# Altium PCB BopItProject.PcbDoc
Units mil, origin at the board's own origin, x right, y up, seen from the top; angles counter-clockwise.
Board outline 5295 x 2490 mil, 2 copper layers (Top Layer, Bottom Layer); 42 components, 69 nets, 177 pads, 0 vias.
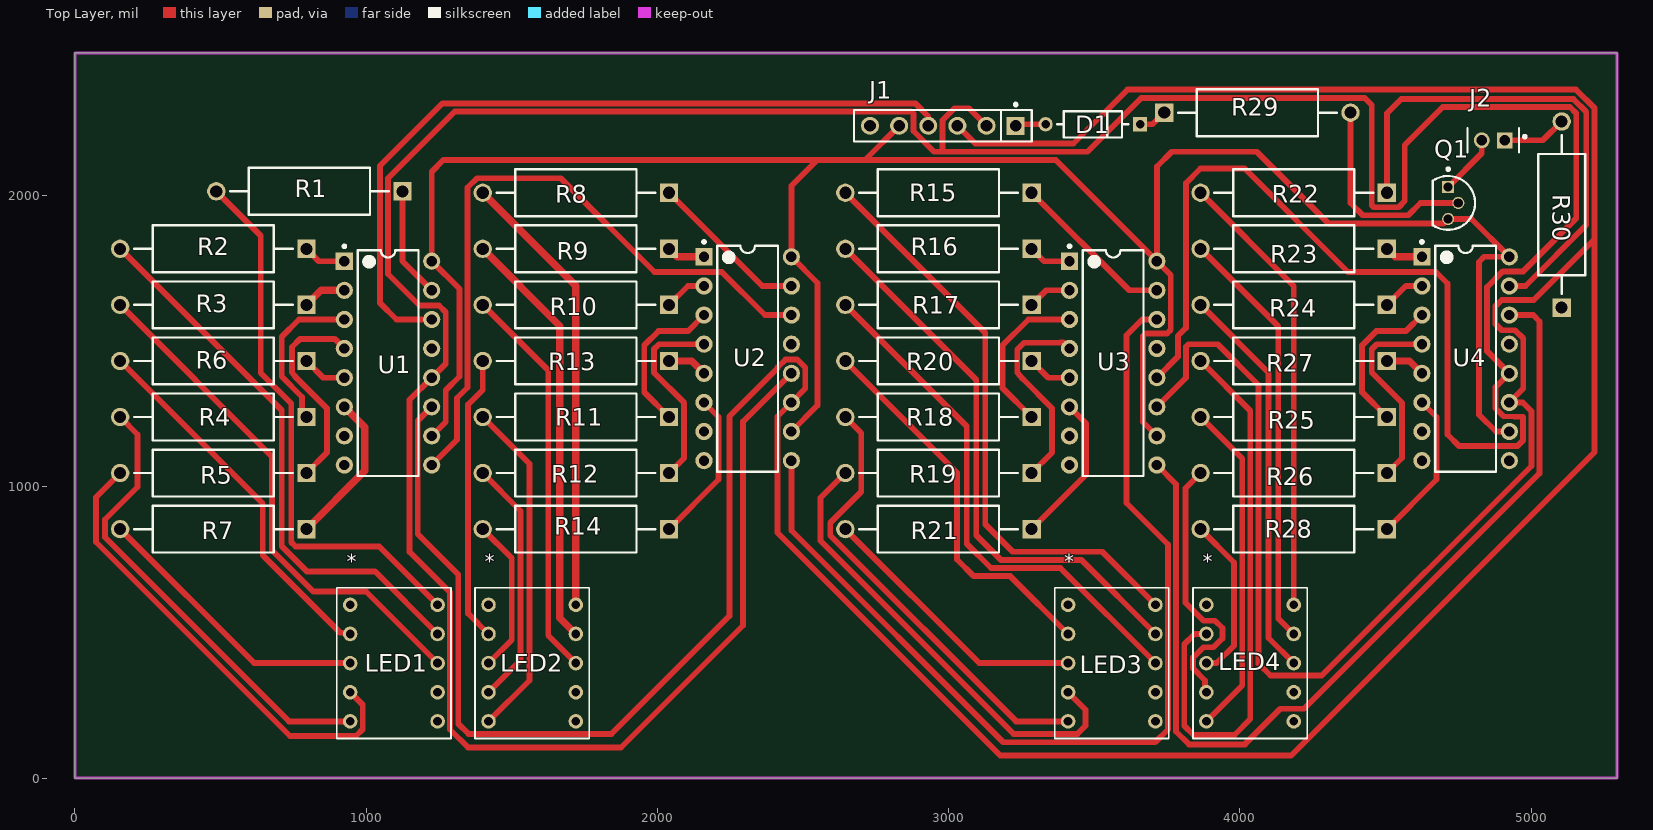
[diagram p0: Top Layer view]
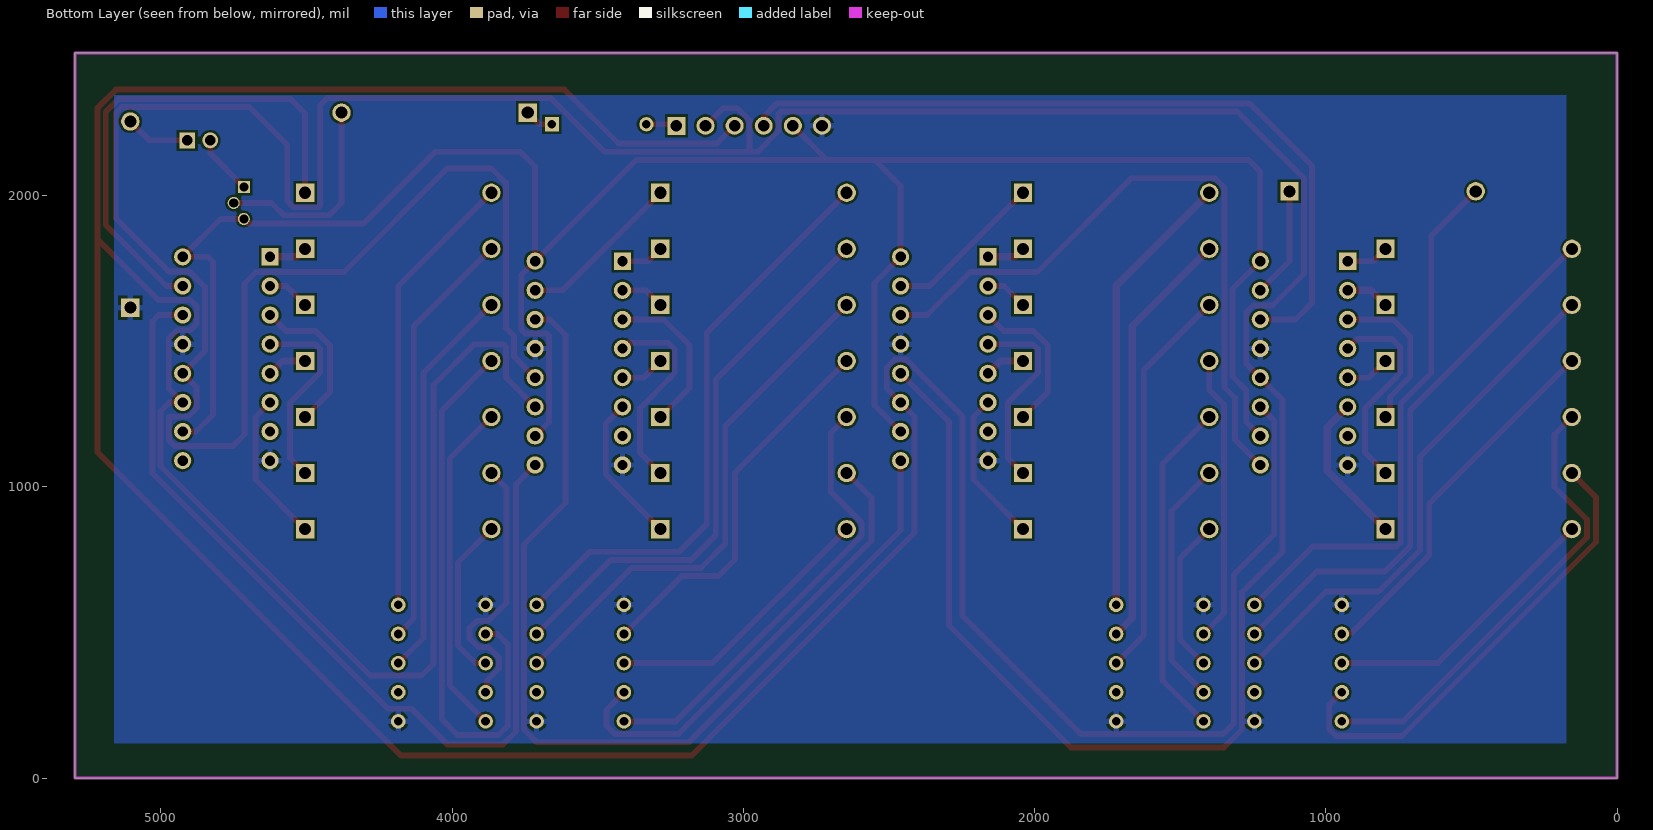
[diagram p1: Bottom Layer view, seen from below]
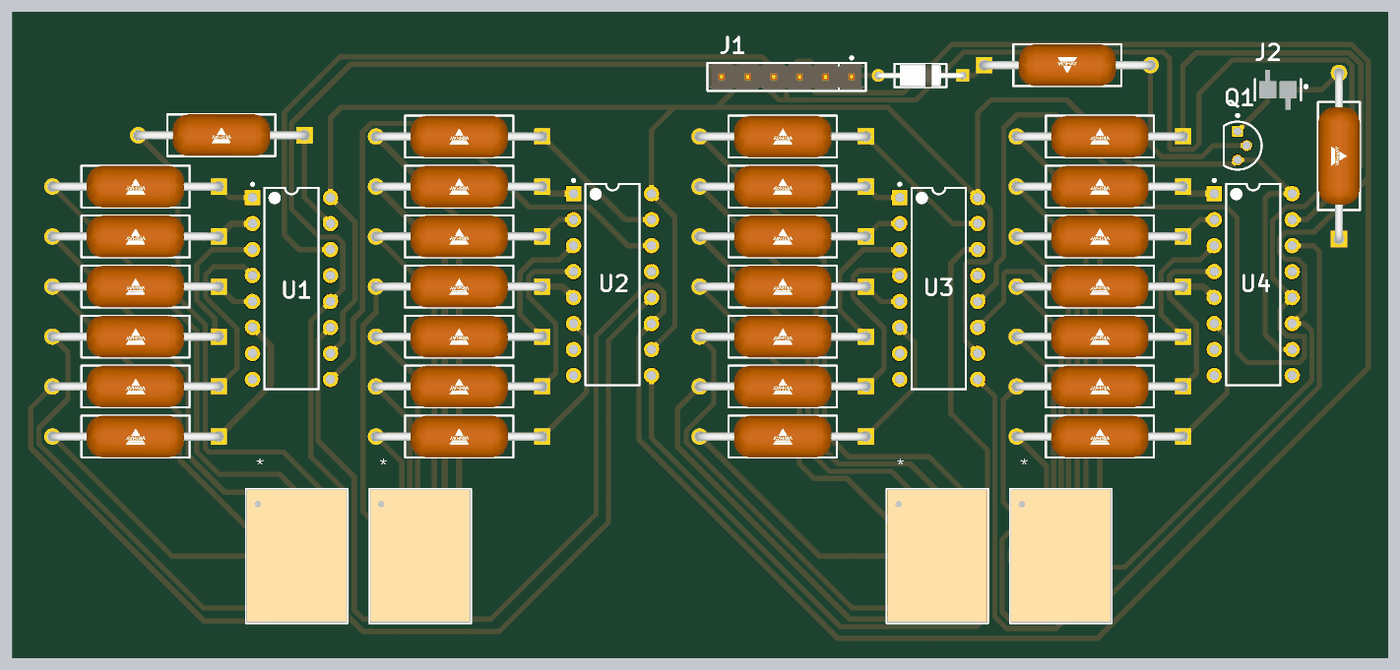
[diagram p2: 3D render of the assembled board from above, using the file's embedded part models]

## Layer stack, top to bottom
Top Solder: solder mask 0.4, Solder Resist, Dk 3.5
Top Layer: signal copper 1.4
Dielectric 1: dielectric 12.6, FR-4, Dk 4.8
Bottom Layer: signal copper 1.4
Bottom Solder: solder mask 0.4, Solder Resist, Dk 3.5

## Board outline
0,0 5295,0 5295,2490 0,2490

## Design rules (kind name [scope] priority, off if disabled: settings)
BoardOutlineClearance [All] p1: gap=7.87 ignorepadtopadclearanceinfootprint=FALSE except(15.75: Arc-SplitBarrior Arc-SplitContinuation Track-SplitBarrior Track-SplitContinuation SMDPad-SplitBarrior SMDPad-SplitContinuation THPad-SplitBarrior THPad-SplitContinuation Via-SplitBarrior Via-SplitContinuation Fill-SplitBarrior Fill-SplitContinuation Poly-SplitBarrior Poly-SplitContinuation Region-SplitBarrior Region-SplitContinuation Text-SplitBarrior Text-SplitContinuation)
Clearance "Clearance Bottom Layer" [OnLayer('Bottom Layer')] p1: gap=8 ignorepadtopadclearanceinfootprint=TRUE except(10: Arc-Text Track-Text SMDPad-Text THPad-Text Via-Text Fill-Text Poly-Text Region-Text Text-Text)
Clearance "Clearance Top Layer" [OnLayer('Top Layer')] p2: gap=8 ignorepadtopadclearanceinfootprint=TRUE except(10: Arc-Text Track-Text SMDPad-Text THPad-Text Via-Text Fill-Text Poly-Text Region-Text Text-Text)
Clearance [All] p3: gap=7.87 ignorepadtopadclearanceinfootprint=FALSE except(3.5: Arc-Arc Arc-Track Arc-SMDPad Track-Track Track-SMDPad SMDPad-SMDPad; 5: Arc-Via Track-Via SMDPad-Via THPad-Via Via-Via; 10: Arc-Text Track-Text SMDPad-Text THPad-Text Via-Text Fill-Text Poly-Text Region-Text Text-Text)
HoleSize [All] p1: absolutevalues=TRUE maxlimit=248.03 minlimit=7.87 maxpercent=80.000 minpercent=20.000
MinimumAnnularRing [All] p1: minimumring=3
MinimumSolderMaskSliver [All] p1: minsoldermaskwidth=3.94
PolygonConnect PolygonConnect_1 [All] p1: thpad.connectstyle=Relief thpad.reliefconductorwidth=20 thpad.reliefentries=4 thpad.polygonreliefangle="90 Angle" thpad.airgapwidth=10 smdpad.connectstyle=Relief smdpad.reliefconductorwidth=20 smdpad.reliefentries=4 smdpad.polygonreliefangle="90 Angle" smdpad.airgapwidth=10 via.connectstyle=Direct via.reliefconductorwidth=20 via.reliefentries=4 via.polygonreliefangle="90 Angle" via.airgapwidth=10
RoutingLayers [All] p1: top layer_v5=TRUE bottom layer_v5=FALSE
RoutingVias [All] p1: holewidth=19.68 width=39.37 viastyle="Through Hole" minholewidth=7.87 minwidth=17.72 maxholewidth=39.37 maxwidth=78.74
SilkToSilkClearance [All] p1: silktosilkclearance=3.94
SilkToSolderMaskClearance [IsPad] p1: minsilkscreentomaskgap=3.94 clearancetoexposedcopper=TRUE
SolderMaskExpansion [All] p1: expansion=4 istentingtop=FALSE
SupplyNets "Schematic Supply Nets" [InNet('GND')] p1: voltage=0.000
Width [All] p1: maxlimit=100 minlimit=10 preferedwidth=20 minimp=50.000000 maximp=50.000000 favimp=50.000000
25 further rules are at their usual default settings.

## Components (designator, comment, footprint, x,y, rotation, side; value= is the part's Value field where it differs from the comment)
D1 "1N5987B" FP-DO-35-MFG 3495,2245 r180 top
J1 "22-28-4063" FP-22-28-4063-MFG 2980,2240 r180 top
J2 "TMM-102-04-G-S" FP-TMM-102-04-G-S-MFG 4870,2190 r180 top
LED1 "LTS-4802BJR-H1" LTS-4802BJR-H1_LTO 945,595 r0 top
LED2 "LTS-4802BJR-H1" LTS-4802BJR-H1_LTO 1420,595 r0 top
LED3 "LTS-4802BJR-H1" LTS-4802BJR-H1_LTO 3410,595 r0 top
LED4 "LTS-4802BJR-H1" LTS-4802BJR-H1_LTO 3885,595 r0 top
Q1 "2N7000" ONSC-TO-92-3-29-11 4715,1975 r270 top
R1 "RLR20C2201GSB14" FP-RLR20-MFG 805,2015 r180 top
R2 "RLR20C2201GSB14" FP-RLR20-MFG 475,1817.5 r180 top
R3 "RLR20C2201GSB14" FP-RLR20-MFG 475,1625 r180 top
R4 "RLR20C2201GSB14" FP-RLR20-MFG 475,1240 r180 top
R5 "RLR20C2201GSB14" FP-RLR20-MFG 475,1047.5 r180 top
R6 "RLR20C2201GSB14" FP-RLR20-MFG 475,1432.5 r180 top
R7 "RLR20C2201GSB14" FP-RLR20-MFG 475,855 r180 top
R8 "RLR20C2201GSB14" FP-RLR20-MFG 1720,2010 r180 top
R9 "RLR20C2201GSB14" FP-RLR20-MFG 1720,1817.5 r180 top
R10 "RLR20C2201GSB14" FP-RLR20-MFG 1720,1625 r180 top
R11 "RLR20C2201GSB14" FP-RLR20-MFG 1720,1240 r180 top
R12 "RLR20C2201GSB14" FP-RLR20-MFG 1720,1047.5 r180 top
R13 "RLR20C2201GSB14" FP-RLR20-MFG 1720,1432.5 r180 top
R14 "RLR20C2201GSB14" FP-RLR20-MFG 1720,855 r180 top
R15 "RLR20C2201GSB14" FP-RLR20-MFG 2965,2010 r180 top
R16 "RLR20C2201GSB14" FP-RLR20-MFG 2965,1817.5 r180 top
R17 "RLR20C2201GSB14" FP-RLR20-MFG 2965,1625 r180 top
R18 "RLR20C2201GSB14" FP-RLR20-MFG 2965,1240 r180 top
R19 "RLR20C2201GSB14" FP-RLR20-MFG 2965,1047.5 r180 top
R20 "RLR20C2201GSB14" FP-RLR20-MFG 2965,1432.5 r180 top
R21 "RLR20C2201GSB14" FP-RLR20-MFG 2965,855 r180 top
R22 "RLR20C2201GSB14" FP-RLR20-MFG 4185,2010 r180 top
R23 "RLR20C2201GSB14" FP-RLR20-MFG 4185,1817.5 r180 top
R24 "RLR20C2201GSB14" FP-RLR20-MFG 4185,1625 r180 top
R25 "RLR20C2201GSB14" FP-RLR20-MFG 4185,1240 r180 top
R26 "RLR20C2201GSB14" FP-RLR20-MFG 4185,1047.5 r180 top
R27 "RLR20C2201GSB14" FP-RLR20-MFG 4185,1432.5 r180 top
R28 "RLR20C2201GSB14" FP-RLR20-MFG 4185,855 r180 top
R29 "RLR20C2201GSB14" FP-RLR20-MFG 4060,2285 r0 top
R30 "RLR20C2201GSB14" FP-RLR20-MFG 5105,1935 r90 top
U1 "SN74AHCT594N" N0016A 1075,1425 r0 top
U2 "SN74AHCT594N" N0016A 2310,1440 r0 top
U3 "SN74AHCT594N" N0016A 3565,1425 r0 top
U4 "SN74AHCT594N" N0016A 4775,1440 r0 top

## Footprints (in the part's own frame and the unit in brackets; to place one, negate y for a bottom-side part, rotate by r counter-clockwise, add the part's x,y. Pads: shape width x height; smd on the part's side, far side on the other; paste and mask are expansions set on the pad)
FP-22-28-4063-MFG [mm]
  rect 1.57x1.57 hole 1.02 paste-2539.97 mask+0: 1(-6.35,0)
  round 1.57 hole 1.02 paste-2539.97 mask+0: 2(-3.81,0) 3(-1.27,0) 4(1.27,0) 5(3.81,0) 6(6.35,0)
  silkscreen extent -7.75,-1.97 7.75,1.37, body extent -7.85,-1.47 7.85,1.47, height 0.25
FP-DO-35-MFG [mm]
  rect 1.25x1.25 hole 0.75 paste-2539.97 mask+0: 1(-4.12,0)
  round 1.25 hole 0.75 paste-2539.97 mask+0: 2(4.12,0)
  silkscreen extent -3.09,-1.14 3.09,1.14, body extent -4.84,-1.24 4.84,1.24, height 0.25
FP-RLR20-MFG [mm]
  rect 1.6x1.6 hole 1.05 paste-2539.97 mask+0: 1(-8.123,0)
  round 1.6 hole 1.05 paste-2539.97 mask+0: 2(8.123,0)
  silkscreen extent -6.92,-2.05 6.92,2.05, body extent -9.02,-2.14 9.02,2.14, height 0.25
FP-TMM-102-04-G-S-MFG [mm]
  rect 1.39x1.39 hole 0.89 paste-2539.97 mask+0: 1(-1,0)
  round 1.39 hole 0.89 paste-2539.97 mask+0: 2(1,0)
  silkscreen extent -2.87,-1.05 2.25,1.05
LTS-4802BJR-H1_LTO [mil]
  round 50 / inner round 60 / far side round 50 hole 30 paste-99999 mask+0: 1(0,0) 2(0,-100) 3(0,-200) 4(0,-300) 5(0,-400) 6(300,-400) 7(300,-300) 8(300,-200) 9(300,-100) 10(300,0)
  silkscreen extent -46,-459 346,59, body extent -41,-454 341,54, height 240
N0016A [mm] "DIP, 16-Leads, Body 19.7x6.6mm, Pitch 2.54mm"
  rect 1.5x1.5 hole 0.9: 1(-3.81,8.89)
  round 1.5 hole 0.9: 2(-3.81,6.35) 3(-3.81,3.81) 4(-3.81,1.27) 5(-3.81,-1.27) 6(-3.81,-3.81) 7(-3.81,-6.35) 8(-3.81,-8.89) 9(3.81,-8.89) 10(3.81,-6.35) 11(3.81,-3.81) 12(3.81,-1.27) 13(3.81,1.27) 14(3.81,3.81) 15(3.81,6.35) 16(3.81,8.89)
  silkscreen extent -3.93,-9.85 2.65,10.31, body extent -3.95,-9.85 3.95,9.85, height 5.08
ONSC-TO-92-3-29-11 [mm] "TO, 3-Leads, Body Dia 4.7mm, Pitch 1.27mm"
  rect 1.05x1.05 hole 0.8: 1(-1.397,0)
  round 1.05 hole 0.8: 2(0,0.889) 3(1.397,0)
  silkscreen extent -3.07,-1.34 2.35,2.35, body extent -2.35,-1.33 2.36,2.36, height 7.87

## Part data
D1: library part CMP-00252-95804900-1, "1N5987B Diode Zener Single 3V 5% 480mW 2-Pin DO-35", Case/Package=Axial, Max Operating Temperature=175°C, Max Power Dissipation=500mW, Max Reverse Leakage Current=50µA, Min Operating Temperature=-65°C, Reverse Voltage=1V, Tolerance=5%, Voltage Rating (DC)=3V, Element Configuration=Single, Height=2.29mm, Impedance=95Ω, Lead Free="Lead Free", Lifecycle Status=Production, Mount="Through Hole", NexarPartId=95804900, Number of Pins=2, Packaging=Bulk, Power Dissipation=500mW, Power Rating=500mW, Radiation Hardening=Yes, RoHS=Compliant, Zener Voltage=3V
J1: library part CMP-04776-000885-1, "CONN HEADER VERT 6POS 2.54MM", Color=Black, Contact Resistance=20mR, Current Rating=4A, Flammability Rating="UL94 V-0", Max Operating Temperature=75°C, Max Voltage Rating (AC)=250V, Max Voltage Rating (DC)=250.25kV, Min Operating Temperature=0°C, Package Quantity=1, Connector Type="Male Pin", Contact Material=Brass, Contact Mating Length=0.24inch, Contact Plating=Gold, Contact Type="Male Pin", Depth=2.49mm, Gender=Male, Glow Wire Compliant=Non-compliant, Housing Color=Black, Housing Material=Thermoplastic, Lead Free="Lead Free", Mount="Through Hole", Number of Circuits=6, Number of Contacts=6, Number of Positions=6, Number of Rows=1, Orientation=Straight, Packaging=Bulk, Pitch=2.54mm, Radiation Hardening=No, RoHS Compliant=Yes, Series="KK® 42375", Termination=Solder, Voltage Rating=250V, Voltage Rating (DC)=250V
J2: library part CMP-02766-001609-1, "2MM TERMINAL STRIP", Housing Color=Black, Max Current Rating=3.9A, Max Operating Temperature=125°C, Max Voltage Rating (AC)=500V, Min Operating Temperature=-55°C, Contact Material=Bronze, Contact Plating=Gold, Depth=1.97mm, Gender=Male, Housing Material=Polymer, Length=4mm, Number of Contacts=2, Number of Rows=1, Orientation=Straight, Packaging=Bulk, Pitch=2mm, Radiation Hardening=No, RoHS Compliant=Yes, Termination=Solder
LED1 LED2 LED3 LED4: library part CMP-007-00036-1, "Description", Manufacturer_Name=LITE-ON, Copyright="Copyright (C) 2025 Ultra Librarian. All rights reserved.", Design Item ID=LTS-4802BJR-H1, Manufacturer_Part_Number=LTS-4802BJR-H1, RefDes=RefDes, Source=LTS-4802BJR-H1.SchLib, Type=Type
Q1: library part CMP-1058-00936-1, "Small Signal MOSFET, 200 mA, 60 V, N-Channel, 3-Pin TO-92, Bulk Box", Manufacturer="On Semiconductor", Package Type=TO-92, Channel Polarity="N Channel", Ciss Typ (pF)=60, ComponentLink1Description="Manufacturer URL", ComponentLink1URL=http://www.onsemi.com/, ComponentLink2Description=Datasheet, ComponentLink2URL=http://www.onsemi.com/pub_link/Collateral/2N7000-D.PDF, ComponentLink3Description="Package Specification", ComponentLink3URL=http://www.onsemi.cn/pub_link/Collateral/2N6426-D.PDF, Configuration=Single, Coss Typ (pF)=25, Crss Typ (pF)=5, DatasheetVersion="Rev. 8", ID Max (A)=0.2, Mounting Technology="Through Hole", PackageDescription="3-Pin Transistor Outline, Body 4.825 x 3.685 mm, Pitch 1.27 mm", PackageReference=TO-92-3-29-11_AM_SL, PackageVersion="Rev. AM", Packing="Bulk Box", PartNumber=2N7000, PD Max (W)=0.35, V(BR)DSS Min (V)=60, VGS Max (V)=20, VGS(th) Max (V)=3
R1 R2 R3 R4 R5 R6 R7 R8 R9 R10 R11 R12 R13 R14 R15 R16 R17 R18 R19 R20 R21 R22 R23 R24 R25 R26 R27 R28 R29 R30: library part CMP-00030-65507579-1, "RLR20C2201GSB14 Res 2.2K Ohm 2% 1/2W Axial", Case/Package=Axial, Max Operating Temperature=150°C, Min Operating Temperature=-65°C, Power Rating=500mW, Resistance=2.2kΩ, Temperature Coefficient=100ppm/°C, Tolerance=2%, Voltage Rating=350V, Composition="Metal Film", Height=4.09mm, Lead Free="Contains Lead", Length=391µm, NexarPartId=65507579, Packaging=Bulk, RoHS=Non-Compliant
U1 U2 U3 U4: library part CMP-0780-00150-3, "8-Bit Shift Registers With Output Registers, N0016A, TUBE", F @ Nom Voltage(Max)(Mhz)=70, Generic Part Number=SN74AHCT594, ICC @ Nom Voltage(Max)(mA)=0.02, Manufacturer="Texas Instruments", Operating Temperature Range(C)="-40 to 125", Rating=Catalog, tpd @ Nom Voltage(Max)(ns)=10.1, Voltage(Nom)(V)=5, 3-State Output=No, Code_JEDEC=MS-001, DatasheetVersion=SCLS417I, Input Type=TTL, Output Drive (IOL/IOH)(Max)(mA)=8/-8, Output Type=CMOS, PackageReference=N0016A, PackageVersion=http://www.ti.com/lit/ml/mpdi002c/mpdi002c.pdf, Technology Family=AHCT, VCC(Max)(V)=5.5, VCC(Min)(V)=4.5

## Nets (pads, with @x,y where several pads share a name; then routed paths per layer and width w, separated by ;. In a path a pad name is that pad's centre, name@x,y a point inside that pad or via, vN(x,y) a via of type N, cw(c..) or ccw(c..) an arc to the next point about the centre after c; other vN are vias at no path point)
GND: J1.6 LED1.1 LED1.6 LED2.1 LED2.6 LED3.1 LED3.6 LED4.1 LED4.6 R30.1 U1.8 U1.13 U2.8 U2.13 U3.8 U3.13 U4.8 U4.13
NetD1_1: D1.1 R29.1 | length 99.6
  Top Layer w20: D1.1 3700.2,2245 R29.1
NetD1_2: D1.2 J1.1 | length 104.9
  Top Layer w20: J1.1 3235,2245 D1.2
NetJ1_2: J1.2 U1.12 U2.12 U3.12 U4.12 | length 13539.8
  Top Layer w20: U2.12 2294,1224 2294,524 1875,105 1350,105 1288,167 1288,638 1149,777 1149,1299 U1.12 1273,1423 1273,1600 1250,1623 1183,1623 1075,1731 1075,2060 1303.91,2288.91 2871.09,2288.91 2879,2281 2879,2221.84 2949.84,2151 2979,2151 ; J1.2 3070,2300 3020,2300 2979,2259 2979,2151 ; U3.12 3787,1447 3787,1518 3815,1546 3815,2043 3865,2093 4016.32,2093 4371.32,1738 4673,1738 4713,1698 4713,1180 4753,1140 4952.53,1140 4972.53,1160 4972.53,1240 4905,1242.47 4877.47,1270 4877.47,1342.47 U4.12 4849,1466 4849,1686 4903,1740 4973,1740 5155,1922 5155,2282.7 5133.4,2304.3 4696.3,2304.3 4566,2174 4566,1981.5 4545,1960.5 4459.5,1960.5 4453,1967 4453,2311 4429,2335 3661,2335 3477,2151 2979,2151
NetJ1_3: J1.3 U1.11 U2.11 U3.11 U4.11 | length 14872.3
  Top Layer w20: U1.11 1177,1227 1177,838 1316,699 1316,187 1351,152 1842,152 2247,557 2247,1242 2412.47,1407.47 2412.47,1409.69 2440.31,1437.53 2479.69,1437.53 2507.53,1409.69 2507.53,1337.53 U2.11 2412,1242 2412,843 3177,78 4176,78 5218,1120 5218,1851 ; J1.3 3091,2179 3429,2179 3614,2364 5154,2364 5218,2300 5218,1851 ; U3.11 3815,1375 3815,1481 3824,1490 3924,1490 4064,1350 4064,393 4105,352 4281,352 5001,1072 5001,1260 4971,1290 U4.11 4973,1338 4973,1510 4945,1538 4899,1538 4877,1560 4877,1620 4899,1642 5009,1642 5218,1851
NetJ1_4: J1.4 U1.14 | length 2694.2
  Top Layer w20: U1.14 1104,1575 1047,1632 1047,2102 1261.91,2316.91 2885,2316.91 2930,2271.91 J1.4
NetJ1_5: J1.5 Q1.3 U1.10 U1.16 U2.10 U2.16 U3.10 U3.16 U4.10 U4.16 | length 8049.8
  Top Layer w20: U1.10 1273,1223 1273,1332 1320,1379 1320,1680 U1.16 1225,2080.5 ; 1225,2082.5 1265,2122.5 2548.5,2122.5 ; U2.10 2550,1280 2550,1700 U2.16 2460,2034 2548.5,2122.5 ; J1.5 2712.5,2122.5 ; U3.10 3667,1223 3667,1518.5 3675.5,1527 3749.53,1527 3762.53,1540 3762.53,1727.47 U3.16 ; U4.10 4879,1190 4821,1248 4821,1772.57 4838.43,1790 U4.16 4795,1920 Q1.3 4699,1904 4305,1904 4058,2151 3766,2151 3715,2100 U3.16 ; 2548.5,2122.5 2712.5,2122.5 ; 2712.5,2122.5 3367.5,2122.5 U3.16
NetJ2_1: J2.1 R30.2 | length 222.5
  Top Layer w20: J2.1 5040.2,2190 R30.2
NetJ2_2: J2.2 Q1.1 | length 207.9
  Top Layer w20: Q1.1 4830.63,2145.63 J2.2
NetLED1_2: LED1.2 R6.2 | length 1282.2
  Top Layer w20: R6.2 645,942.7 645,765 911.11,498.89 941.11,498.89 LED1.2
NetLED1_3: LED1.3 R7.2 | length 980.3
  Top Layer w20: R7.2 615.2,395 LED1.3
NetLED1_4: LED1.4 R5.2 | length 1617.2
  Top Layer w20: R5.2 72,964.3 72,811 738,145 965,145 988,168 988,252 LED1.4
NetLED1_5: LED1.5 R4.2 | length 1587.8
  Top Layer w20: R4.2 215,1180.2 215,1000 103.2,888.2 103.2,826.8 735,195 LED1.5
NetLED1_8: LED1.8 R3.2 | length 1787.4
  Top Layer w20: R3.2 676.81,1103.39 676.81,782.31 818.61,640.5 999.5,640.5 LED1.8
NetLED1_9: LED1.9 R2.2 | length 1911.1
  Top Layer w20: R2.2 709.81,1262.89 709.81,795.98 795.78,710 1030,710 LED1.9
NetLED1_10: LED1.10 R1.2 | length 1903.2
  Top Layer w20: R1.2 637.84,1862.35 637.84,1391.17 742.81,1286.2 742.81,809.64 757.45,795 1045,795 LED1.10
NetLED2_2: LED2.2 R13.2 | length 987.3
  Top Layer w20: R13.2 1400.2,1332.89 1350,1282.7 1350,565 LED2.2
NetLED2_3: LED2.3 R14.2 | length 534.2
  Top Layer w20: R14.2 1499.62,755.57 1499.62,474.62 LED2.3
NetLED2_4: LED2.4 R12.2 | length 851.9
  Top Layer w20: R12.2 1530.12,917.57 1530.12,405.12 LED2.4
NetLED2_5: LED2.5 R11.2 | length 1169.7
  Top Layer w20: R11.2 1560.62,1079.57 1560.62,335.62 LED2.5
NetLED2_8: LED2.8 R10.2 | length 1362.5
  Top Layer w20: R10.2 1625,1400.2 1625,490 LED2.8
NetLED2_9: LED2.9 R9.2 | length 1455
  Top Layer w25: R9.2 1665,1552.7 1665,550 LED2.9
NetLED2_10: LED2.10 R8.2 | length 1547.5
  Top Layer w25: R8.2 1720,1690.2 LED2.10
NetLED3_2: LED3.2 R20.2 | length 1327.9
  Top Layer w20: R20.2 3028.84,1048.85 3028.84,750.49 3085.82,693.5 3211.5,693.5 LED3.2
NetLED3_3: LED3.3 R21.2 | length 955.3
  Top Layer w20: R21.2 3105.2,395 LED3.3
NetLED3_4: LED3.4 R19.2 | length 1603.7
  Top Layer w20: R19.2 2560.2,962.5 2560.2,814.8 3223,152 3442,152 3470,180 3470,235 LED3.4
NetLED3_5: LED3.5 R18.2 | length 1554.7
  Top Layer w20: R18.2 2700,1185.2 2700,983.34 2593.2,876.54 2593.2,833.46 3231.66,195 LED3.5
NetLED3_8: LED3.8 R17.2 | length 1810.8
  Top Layer w20: R17.2 3061.84,1208.35 3061.84,804.66 3145,721.5 3383.5,721.5 LED3.8
NetLED3_9: LED3.9 R16.2 | length 1925.3
  Top Layer w20: R16.2 3094.84,1367.85 3094.84,833.97 3179.31,749.5 3455.5,749.5 LED3.9
NetLED3_10: LED3.10 R15.2 | length 2036.3
  Top Layer w20: R15.2 3125.93,1529.27 3125.93,871.38 3219.8,777.5 3527.5,777.5 LED3.10
NetLED4_2: LED4.2 R27.2 | length 1933.7
  Top Layer w20: R27.2 4035.79,1261.9 4035.79,202.64 3981.15,148 3841,148 3809,180 3809,460 3844,495 LED4.2
NetLED4_3: LED4.3 R28.2 | length 567.2
  Top Layer w20: R28.2 3979.79,740.4 3979.79,454.79 3920,395 LED4.3
NetLED4_4: LED4.4 R26.2 | length 930.4
  Top Layer w20: R26.2 3813.2,995.5 3813.2,602.45 3875.15,540.5 3914.86,540.5 3940,515.36 3940,480 3909.5,449.5 3875.15,449.5 3839.5,413.85 3839.5,376.15 3880.22,335.43 3880.22,299.78 LED4.4
NetLED4_5: LED4.5 R25.2 | length 1154.9
  Top Layer w20: R25.2 4007.79,1097.4 4007.79,317.79 LED4.5
NetLED4_8: LED4.8 R24.2 | length 1362.5
  Top Layer w20: R24.2 4098.5,1391.7 4098.5,481.5 LED4.8
NetLED4_9: LED4.9 R23.2 | length 1455
  Top Layer w20: R23.2 4131.5,1551.2 4131.5,548.5 LED4.9
NetLED4_10: LED4.10 R22.2 | length 1547.5
  Top Layer w20: R22.2 4185,1690.2 LED4.10
NetQ1_2: Q1.2 R29.2 | length 715.7
  Top Layer w20: R29.2 4379.8,1974.46 4421.76,1932.5 4577.99,1932.5 4620.49,1975 Q1.2
NetR1_1: R1.1 U1.15 | length 381.5
  Top Layer w20: R1.1 1124.8,1775.2 U1.15
NetR2_1: R2.1 U1.1 | length 147.8
  Top Layer w20: R2.1 837.3,1775 U1.1
NetR3_1: R3.1 U1.2 | length 150.9
  Top Layer w25: R3.1 844.8,1675 U1.2
NetR4_1: R4.1 U1.3 | length 550.8
  Top Layer w20: R4.1 779.65,1255.15 779.65,1309 709.81,1378.84 709.81,1515.92 768.89,1575 U1.3
NetR5_1: R5.1 U1.4 | length 715.5
  Top Layer w20: R5.1 865,1117.7 865,1270.32 755,1380.32 745.31,1393.55 745.31,1480 773.59,1508.28 891.72,1508.28 U1.4
NetR6_1: R6.1 U1.5 | length 154
  Top Layer w20: R6.1 852.3,1375 U1.5
NetR7_1: R7.1 U1.6 | length 531.9
  Top Layer w25: R7.1 995,1055.2 995,1205 U1.6
NetR8_1: R8.1 U2.15 | length 552.7
  Top Layer w20: R8.1 2359.8,1690 U2.15
NetR9_1: R9.1 U2.1 | length 131.6
  Top Layer w25: R9.1 2067.3,1790 U2.1
NetR10_1: R10.1 U2.2 | length 147.1
  Top Layer w20: R10.1 2104.8,1690 U2.2
NetR11_1: R11.1 U2.3 | length 529.6
  Top Layer w20: R11.1 1954.81,1325 1954.81,1486.16 2003.47,1534.82 2104.82,1534.82 U2.3
NetR12_1: R12.1 U2.4 | length 669
  Top Layer w20: R12.1 2091.8,1099.5 2091.8,1288.52 1987.81,1392.51 1987.81,1472.49 2005.32,1490 U2.4
NetR13_1: R13.1 U2.5 | length 137.8
  Top Layer w25: R13.1 2117.5,1432.5 U2.5
NetR14_1: R14.1 U2.6 | length 526.2
  Top Layer w20: R14.1 2210,1025.2 2210,1240 U2.6
NetR15_1: R15.1 U3.15 | length 569
  Top Layer w20: R15.1 3619.8,1675 U3.15
NetR16_1: R16.1 U3.1 | length 147.8
  Top Layer w20: R16.1 3327.3,1775 U3.1
NetR17_1: R17.1 U3.2 | length 150.9
  Top Layer w20: R17.1 3334.8,1675 U3.2
NetR18_1: R18.1 U3.3 | length 554.7
  Top Layer w20: R18.1 3184.45,1340.35 3184.45,1485.46 3274,1575 U3.3
NetR19_1: R19.1 U3.4 | length 699.8
  Top Layer w20: R19.1 3355,1117.7 3355,1270.32 3255,1370.32 3235.31,1393.55 3235.31,1471.45 3258.86,1495.01 3375.01,1495.01 3384.91,1495.9 3394.1,1495.9 U3.4
NetR20_1: R20.1 U3.5 | length 154
  Top Layer w20: R20.1 3342.3,1375 U3.5
NetR21_1: R21.1 U3.6 | length 521.6
  Top Layer w20: R21.1 3472.59,1042.79 3472.59,1217.41 U3.6
NetR22_1: R22.1 U4.15 | length 1736.5
  Top Layer w20: R22.1 4504.8,2283.09 4554.02,2332.3 5145,2332.3 5189.52,2287.78 5189.52,1898.96 4980.56,1690 U4.15
NetR23_1: R23.1 U4.1 | length 131.6
  Top Layer w25: R23.1 4532.3,1790 U4.1
NetR24_1: R24.1 U4.2 | length 147.1
  Top Layer w20: R24.1 4569.8,1690 U4.2
NetR25_1: R25.1 U4.3 | length 529.6
  Top Layer w20: R25.1 4419.81,1325 4419.81,1486.16 4468.47,1534.82 4569.82,1534.82 U4.3
NetR26_1: R26.1 U4.4 | length 669
  Top Layer w20: R26.1 4556.8,1099.5 4556.8,1288.52 4452.81,1392.51 4452.81,1472.49 4470.32,1490 U4.4
NetR27_1: R27.1 U4.5 | length 137.8
  Top Layer w25: R27.1 4582.5,1432.5 U4.5
NetR28_1: R28.1 U4.6 | length 526.2
  Top Layer w20: R28.1 4675,1025.2 4675,1240 U4.6
NetU1_9: U1.9 U2.14 | length 2323.8
  Top Layer w20: U1.9 1312,1162 1312,1305.21 1348,1341.21 1348,2027.8 1380.2,2060 1668,2060 1990,1738 2221,1738 2369,1590 U2.14
NetU2_9: U2.9 U3.14 | length 3391.5
  Top Layer w20: U2.9 2460,850 3187,123 3709,123 3753,167 3753,802.43 3611,944.43 3611,1521 3665,1575 U3.14
NetU3_9: U3.9 U4.14 | length 3228.6
  Top Layer w20: U3.9 3781,1009 3781,160 3825,116 4017,116 4139,238 4220.48,238 5029,1046.52 5029,1568 5007,1590 U4.14
pads on no net: LED1.7 LED2.7 LED3.7 LED4.7 U1.7 U2.7 U3.7 U4.7 U4.9

## Polygon pours and split planes (outlines as drawn)
GND on Bottom Layer "GND_L02_P001" (solid, pour order 1): 175,120 5160,120 5160,2345 175,2345

## Keep-outs
Top Layer:
  lines w10: 0,0 5295,0 5295,2485 5290,2490 0,2490 0,0
Keep-Out Layer:
  the board outline again, w10

## Text inside footprints (layer, text, board x,y; h text height)
LED1: Top Overlay "*" at 932.5,719.67 h50; Mechanical 13 "*" at 932.5,611.67 h50
LED2: Top Overlay "*" at 1407.5,719.67 h50; Mechanical 13 "*" at 1407.5,611.67 h50
LED3: Top Overlay "*" at 3397.5,719.67 h50; Mechanical 13 "*" at 3397.5,611.67 h50
LED4: Top Overlay "*" at 3872.5,719.67 h50; Mechanical 13 "*" at 3872.5,611.67 h50